# EAGLE board force_sensor_pcb_v2_4pcs (EAGLE 9.2.2)
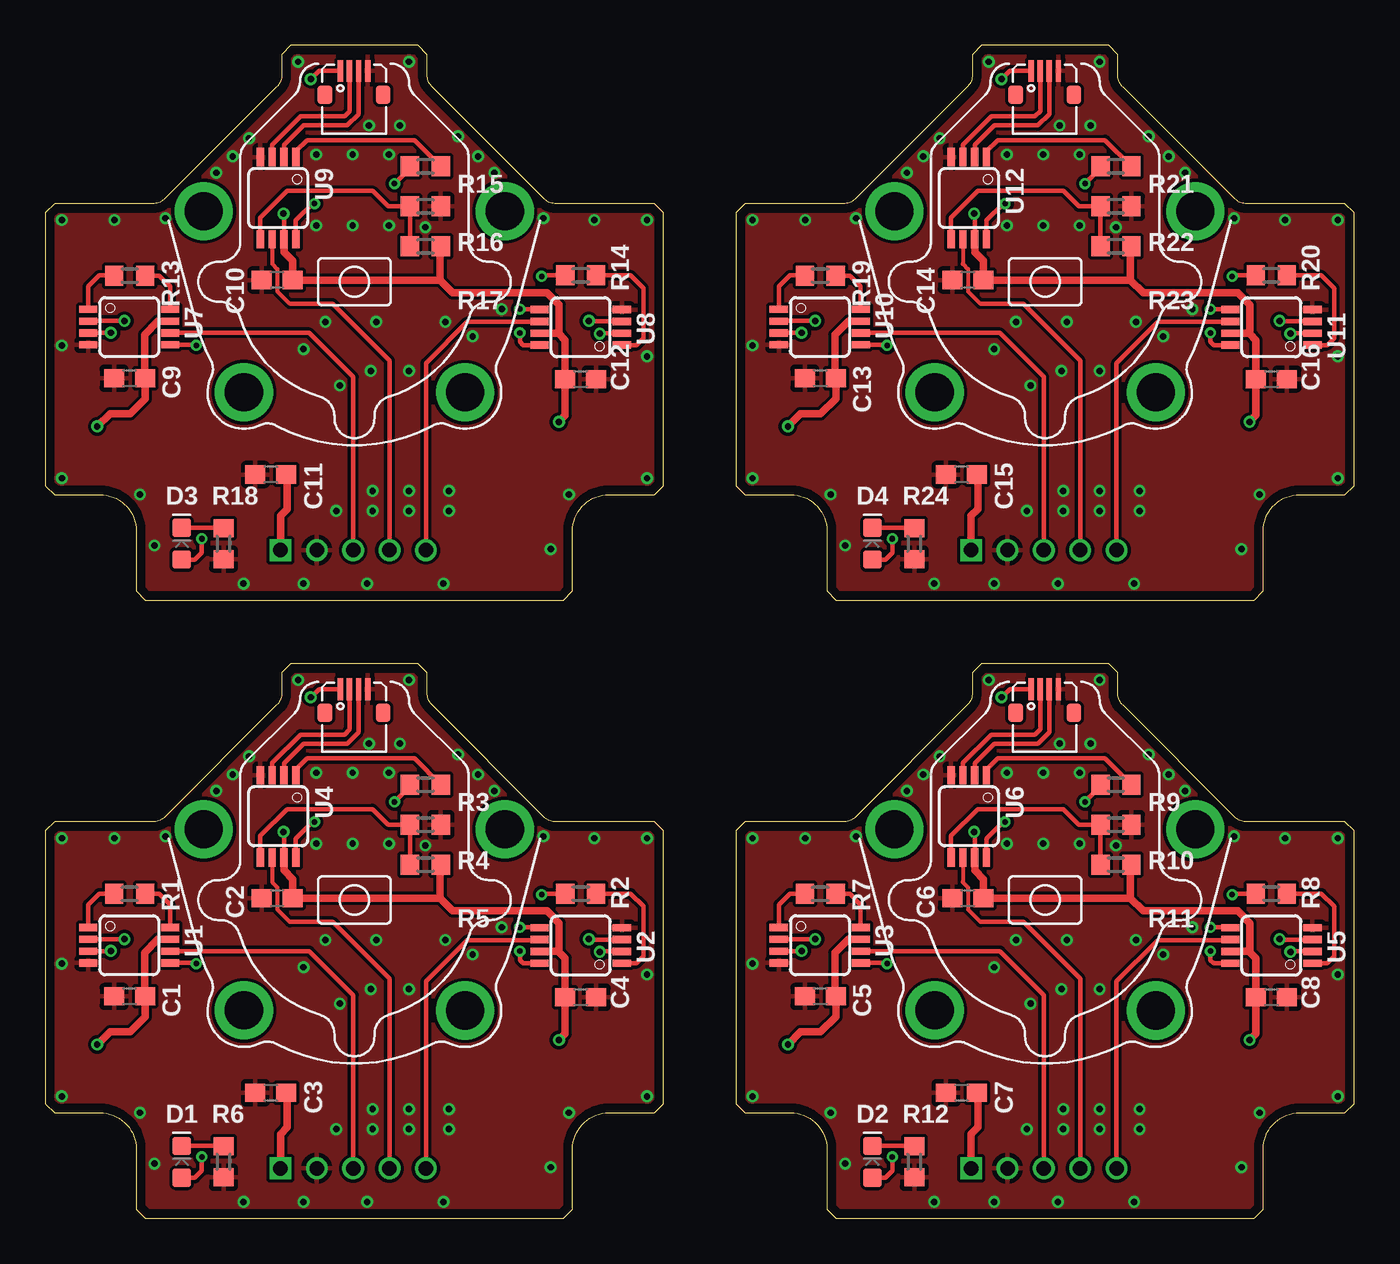
[diagram p0: board, top side]
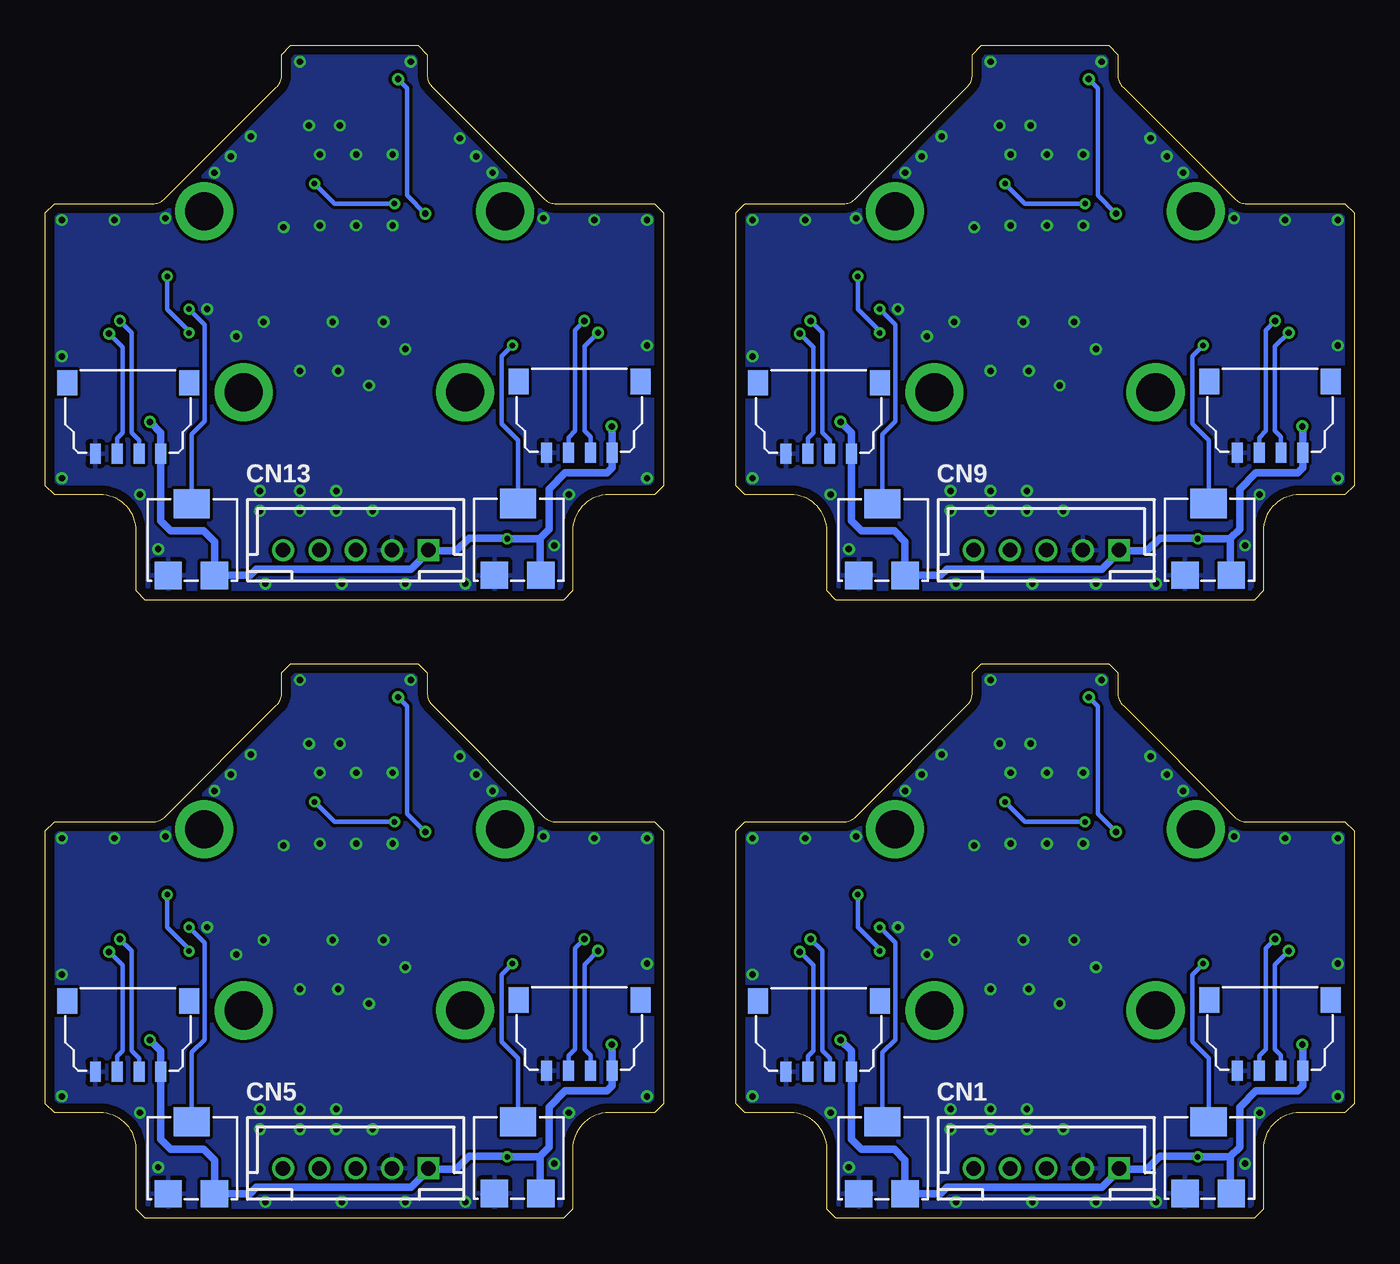
[diagram p1: board, bottom side, seen from below]

Size 72 x 64.5 mm. Coordinates in mm from the lower left corner, seen from the top.
Outline: 28.5,0 29,0.5 29,3.8 arc-90 31,5.8 33.5,5.8 34,6.3 34,21.3 33.5,21.8 28.11,21.8 arc-45 27.4,22.09 21.29,28.2 arc-45 21,28.91 21,30 20.5,30.5 13.5,30.5 13,30 13,28.91 arc-45 12.71,28.2 6.6,22.09 arc-45 5.89,21.8 0.5,21.8 0,21.3 0,6.3 0.5,5.8 3,5.8 arc-90 5,3.8 5,0.5 5.5,0 28.5,0
Outline: 66.5,0 67,0.5 67,3.8 arc-90 69,5.8 71.5,5.8 72,6.3 72,21.3 71.5,21.8 66.11,21.8 arc-45 65.4,22.09 59.29,28.2 arc-45 59,28.91 59,30 58.5,30.5 51.5,30.5 51,30 51,28.91 arc-45 50.71,28.2 44.6,22.09 arc-45 43.89,21.8 38.5,21.8 38,21.3 38,6.3 38.5,5.8 41,5.8 arc-90 43,3.8 43,0.5 43.5,0 66.5,0
Outline: 28.5,34 29,34.5 29,37.8 arc-90 31,39.8 33.5,39.8 34,40.3 34,55.3 33.5,55.8 28.11,55.8 arc-45 27.4,56.09 21.29,62.2 arc-45 21,62.91 21,64 20.5,64.5 13.5,64.5 13,64 13,62.91 arc-45 12.71,62.2 6.6,56.09 arc-45 5.89,55.8 0.5,55.8 0,55.3 0,40.3 0.5,39.8 3,39.8 arc-90 5,37.8 5,34.5 5.5,34 28.5,34
Outline: 66.5,34 67,34.5 67,37.8 arc-90 69,39.8 71.5,39.8 72,40.3 72,55.3 71.5,55.8 66.11,55.8 arc-45 65.4,56.09 59.29,62.2 arc-45 59,62.91 59,64 58.5,64.5 51.5,64.5 51,64 51,62.91 arc-45 50.71,62.2 44.6,56.09 arc-45 43.89,55.8 38.5,55.8 38,55.3 38,40.3 38.5,39.8 41,39.8 arc-90 43,37.8 43,34.5 43.5,34 66.5,34
Copper layers (1*16): Top 0.035mm / dielectric 1.6mm / Bottom 0.035mm
Design rules "Elecrow_2-layer_PCB_eagle_rule": minimum track width 6mil, minimum drill 12mil, track to track 7mil, track to pad 7mil, pad to pad 7mil, via to via 8mil, smd to smd 0mil, copper to edge 20mil, drill to drill 10mil, minimum pad ring 6mil, minimum via ring 6mil, stop-mask expansion 0mil, vias tented up to drill 100mil, thermal gap 10mil

## Footprints (pad centres in the part's own frame; a part is rotated, then mirrored left to right if it is on the bottom)
C0603 = smd 1.1 x 1: 1 -0.85,0; 2 0.85,0
B5B-PH-K-S = drill 0.8 square: 1 -4,0 | drill 0.8: 2 -2,0; 3 0,0; 4 2,0; 5 4,0
DF58-4P = smd 0.6 x 1.1: 1 -1.8,4.6; 2 -0.6,4.6; 3 0.6,4.6; 4 1.8,4.6 | smd 1.1 x 1.4: PAD1 -3.35,0.7; PAD2 3.35,0.7
KYOCERA-6277-4 = smd 0.3 x 1.2: 1 -0.75,1.3; 2 -0.25,1.3; 3 0.25,1.3; 4 0.75,1.3 | smd 0.8 x 1: PAD-1 -1.6,0; PAD-2 1.6,0
LED-0603 = smd 1 x 1: A -0.877,0; C 0.877,0
R0603 = smd 1 x 1.1: 1 -0.85,0; 2 0.85,0
MSOP08 = smd 0.4 x 1: 1 -0.976,-2.263; 2 -0.326,-2.263; 3 0.324,-2.263; 4 0.974,-2.263; 5 0.974,2.262; 6 0.324,2.262; 7 -0.326,2.262; 8 -0.976,2.262
D43A = smd 1.5 x 1.5: 1 1.25,-1.95; 3 -1.3,-1.95 | smd 2 x 1.6: 2 0,2

## Placement (x,y rotation side)
C1  [C0603]  4.63,12.2 180 top
C2  [C0603]  12.75,17.6 180 top
C3  [C0603]  12.4,6.9 180 top
C4  [C0603]  29.45,12.15 0 top
C5  [C0603]  42.63,12.2 180 top
C6  [C0603]  50.75,17.6 180 top
C7  [C0603]  50.4,6.9 180 top
C8  [C0603]  67.45,12.15 0 top
C9  [C0603]  4.63,46.2 180 top
C10  [C0603]  12.75,51.6 180 top
C11  [C0603]  12.4,40.9 180 top
C12  [C0603]  29.45,46.15 0 top
C13  [C0603]  42.63,46.2 180 top
C14  [C0603]  50.75,51.6 180 top
C15  [C0603]  50.4,40.9 180 top
C16  [C0603]  67.45,46.15 0 top
CN1  [B5B-PH-K-S]  16.93,2.74 180 bottom
CN2  DF58-4P4P  [DF58-4P]  4.62,12.71 180 bottom
CN3  DF58-4P4P  [DF58-4P]  29.45,12.65 180 bottom
CN4  KYOCERA-62774P  [KYOCERA-6277-4]  16.98,27.8 0 top
CN5  [B5B-PH-K-S]  54.93,2.74 180 bottom
CN6  DF58-4P4P  [DF58-4P]  42.62,12.71 180 bottom
CN7  KYOCERA-62774P  [KYOCERA-6277-4]  54.98,27.8 0 top
CN8  DF58-4P4P  [DF58-4P]  67.45,12.65 180 bottom
CN9  [B5B-PH-K-S]  16.93,36.74 180 bottom
CN10  DF58-4P4P  [DF58-4P]  4.62,46.71 180 bottom
CN11  KYOCERA-62774P  [KYOCERA-6277-4]  16.98,61.8 0 top
CN12  DF58-4P4P  [DF58-4P]  29.45,46.65 180 bottom
CN13  [B5B-PH-K-S]  54.93,36.74 180 bottom
CN14  DF58-4P4P  [DF58-4P]  42.62,46.71 180 bottom
CN15  KYOCERA-62774P  [KYOCERA-6277-4]  54.98,61.8 0 top
CN16  DF58-4P4P  [DF58-4P]  67.45,46.65 180 bottom
D1  BLUE  [LED-0603]  7.5,3.1 90 top
D2  BLUE  [LED-0603]  45.5,3.1 90 top
D3  BLUE  [LED-0603]  7.5,37.1 90 top
D4  BLUE  [LED-0603]  45.5,37.1 90 top
R1  [R0603]  4.63,17.84 180 top
R2  [R0603]  29.45,17.85 0 top
R3  1.3k  [R0603]  20.9,23.85 0 top
R4  3k  [R0603]  20.9,21.65 0 top
R5  10k  [R0603]  20.9,19.45 180 top
R6  [R0603]  9.8,3.1 270 top
R7  [R0603]  42.63,17.84 180 top
R8  [R0603]  67.45,17.85 0 top
R9  1.3k  [R0603]  58.9,23.85 0 top
R10  3k  [R0603]  58.9,21.65 0 top
R11  10k  [R0603]  58.9,19.45 180 top
R12  [R0603]  47.8,3.1 270 top
R13  [R0603]  4.63,51.84 180 top
R14  [R0603]  29.45,51.85 0 top
R15  1.3k  [R0603]  20.9,57.85 0 top
R16  3k  [R0603]  20.9,55.65 0 top
R17  10k  [R0603]  20.9,53.45 180 top
R18  [R0603]  9.8,37.1 270 top
R19  [R0603]  42.63,51.84 180 top
R20  [R0603]  67.45,51.85 0 top
R21  1.3k  [R0603]  58.9,57.85 0 top
R22  3k  [R0603]  58.9,55.65 0 top
R23  10k  [R0603]  58.9,53.45 180 top
R24  [R0603]  47.8,37.1 270 top
U1  AD623RM-8  [MSOP08]  4.61,15.01 270 top
U2  AD623RM-8  [MSOP08]  29.45,15 90 top
U3  AD623RM-8  [MSOP08]  42.61,15.01 270 top
U4  AD623RM-8  [MSOP08]  12.8,22.1 180 top
U5  AD623RM-8  [MSOP08]  67.45,15 90 top
U6  AD623RM-8  [MSOP08]  50.8,22.1 180 top
U7  AD623RM-8  [MSOP08]  4.61,49.01 270 top
U8  AD623RM-8  [MSOP08]  29.45,49 90 top
U9  AD623RM-8  [MSOP08]  12.8,56.1 180 top
U10  AD623RM-8  [MSOP08]  42.61,49.01 270 top
U11  AD623RM-8  [MSOP08]  67.45,49 90 top
U12  AD623RM-8  [MSOP08]  50.8,56.1 180 top
VR1  D43A  [D43A]  8,3.31 0 bottom
VR2  D43A  [D43A]  25.95,3.3 0 bottom
VR3  D43A  [D43A]  46,3.31 0 bottom
VR4  D43A  [D43A]  63.95,3.3 0 bottom
VR5  D43A  [D43A]  8,37.31 0 bottom
VR6  D43A  [D43A]  25.95,37.3 0 bottom
VR7  D43A  [D43A]  46,37.31 0 bottom
VR8  D43A  [D43A]  63.95,37.3 0 bottom

## Library data of the parts
C1-C16 = rcl; SPICEPREFIX: C
CN1 CN5 CN9 CN13 = jst-ph
CN2-CN4 CN6-CN8 CN10-CN12 CN14-CN16 U1-U12 VR1-VR8 = yunit-tech_eagle_library
D1-D4 = yunit-tech_eagle_library; PROD_ID: DIO-08575
R1-R24 = rcl; SPICEPREFIX: R

## Nets
+3V1: C5.1 C6.1 C7.1 C8.1 CN5.1 CN6.1 CN7.1 CN8.1 D2.A R11.1 U3.7 U5.7 U6.7 VR3.1 VR4.1
+3V2: C9.1 C10.1 C11.1 C12.1 CN9.1 CN10.1 CN11.1 CN12.1 D3.A R17.1 U7.7 U8.7 U9.7 VR5.1 VR6.1
+3V3: C1.1 C2.1 C3.1 C4.1 CN1.1 CN2.1 CN3.1 CN4.1 D1.A R5.1 U1.7 U2.7 U4.7 VR1.1 VR2.1
+3V4: C13.1 C14.1 C15.1 C16.1 CN13.1 CN14.1 CN15.1 CN16.1 D4.A R23.1 U10.7 U11.7 U12.7 VR7.1 VR8.1
A1: CN1.3 U1.6
A2: CN1.4 U4.6
A3: CN1.5 U2.6
A4: CN5.3 U3.6
A5: CN5.4 U6.6
A6: CN5.5 U5.6
A7: CN9.3 U7.6
A8: CN9.4 U9.6
A9: CN9.5 U8.6
A10: CN13.3 U10.6
A11: CN13.4 U12.6
A12: CN13.5 U11.6
GND: C1.2 C2.2 C3.2 C4.2 CN1.2 CN2.4 CN3.4 CN4.4 R4.2 R6.2 U1.4 U2.4 U4.4 VR1.3 VR2.3
GND1: C5.2 C6.2 C7.2 C8.2 CN5.2 CN6.4 CN7.4 CN8.4 R10.2 R12.2 U3.4 U5.4 U6.4 VR3.3 VR4.3
GND2: C9.2 C10.2 C11.2 C12.2 CN9.2 CN10.4 CN11.4 CN12.4 R16.2 R18.2 U7.4 U8.4 U9.4 VR5.3 VR6.3
GND3: C13.2 C14.2 C15.2 C16.2 CN13.2 CN14.4 CN15.4 CN16.4 R22.2 R24.2 U10.4 U11.4 U12.4 VR7.3 VR8.3
N$3: U1.5 VR1.2
N$5: CN2.3 U1.2
N$6: R1.1 U1.8
N$7: R1.2 U1.1
N$8: CN2.2 U1.3
N$10: R2.1 U2.8
N$11: U2.5 VR2.2
N$12: CN3.3 U2.2
N$13: CN3.2 U2.3
N$14: R2.2 U2.1
N$15: R3.1 U4.8
N$16: R4.1 R5.2 U4.5
N$17: CN4.3 U4.2
N$18: CN4.2 U4.3
N$19: R3.2 U4.1
N$20: D1.C R6.1
N$21: R7.1 U3.8
N$22: U3.5 VR3.2
N$23: CN6.3 U3.2
N$24: CN6.2 U3.3
N$29: R7.2 U3.1
N$30: R8.1 U5.8
N$31: U5.5 VR4.2
N$32: CN8.3 U5.2
N$33: CN8.2 U5.3
N$34: R8.2 U5.1
N$35: R9.1 U6.8
N$36: R10.1 R11.2 U6.5
N$37: CN7.3 U6.2
N$38: CN7.2 U6.3
N$39: R9.2 U6.1
N$40: D2.C R12.1
N$41: R13.1 U7.8
N$42: U7.5 VR5.2
N$43: CN10.3 U7.2
N$44: CN10.2 U7.3
N$49: R13.2 U7.1
N$50: R14.1 U8.8
N$51: U8.5 VR6.2
N$52: CN12.3 U8.2
N$53: CN12.2 U8.3
N$54: R14.2 U8.1
N$55: R15.1 U9.8
N$56: R16.1 R17.2 U9.5
N$57: CN11.3 U9.2
N$58: CN11.2 U9.3
N$59: R15.2 U9.1
N$60: D3.C R18.1
N$61: R19.1 U10.8
N$62: U10.5 VR7.2
N$63: CN14.3 U10.2
N$64: CN14.2 U10.3
N$69: R19.2 U10.1
N$70: R20.1 U11.8
N$71: U11.5 VR8.2
N$72: CN16.3 U11.2
N$73: CN16.2 U11.3
N$74: R20.2 U11.1
N$75: R21.1 U12.8
N$76: R22.1 R23.2 U12.5
N$77: CN15.3 U12.2
N$78: CN15.2 U12.3
N$79: R21.2 U12.1
N$80: D4.C R24.1

## Tracks (layer width: path | path; a pad name or v marks a point on that pad's centre or on a via)
+3V1  (via drill 0.3, 0.35)
  Top 0.25: CN7.1 53.05,29.1 v52.6,28.65 | U6.7 51.13,21.22 v51.1,21.25 | D2.A 46.22,2.22 46.6,2.6 v46.6,3.37
  Top 0.4: U5.7 66.11,14.67 66.17,14.73 66.27,14.63 | 66.27,14.63 66.6,14.3 C8.1 66.6,10.15 v66.25,9.8 | U6.7 51.13,19.12 51.6,18.65 C6.1 59.7,17.6 | U3.7 44.19,15.34 43.45,14.6 43.45,12.23 C5.1 43.48,11.08 42.65,10.25 41.55,10.25 v40.85,9.55 | CN5.1 50.93,4.63 51.3,5 51.3,6.85 C7.1 | 66.27,14.63 66.27,16.23 65.6,16.9 60.4,16.9 59.7,17.6 | 59.7,17.6 59.7,19.4 R11.1
  Bottom 0.25: v51.1,21.25 52.1,22.25 52.1,28.15 v52.6,28.65
  Bottom 0.4: v40.85,9.55 40.82,9.52 CN6.1 40.82,7.28 41.1,7 43.4,7 44.3,6.1 44.3,3.9 44.8,3.4 | v66.25,9.8 65.65,9.2 CN8.1 65.65,4.35 65.1,3.8 63.3,3.8 62.7,3.2 VR4.1 60.75,1.35 60.4,1.7 51.89,1.7 50.89,2.7 | VR3.1 44.8,1.41 44.8,3.4 | 50.89,2.7 49.4,2.7 48.7,3.4 46.63,3.4 v46.6,3.37 44.83,3.37 44.8,3.4 | 50.89,2.7 CN5.1
+3V2  (via drill 0.3, 0.35)
  Top 0.25: CN11.1 15.05,63.1 v14.6,62.65 | U9.7 13.13,55.22 v13.1,55.25 | D3.A 8.22,36.22 8.6,36.6 v8.6,37.37
  Top 0.4: U8.7 28.11,48.67 28.17,48.73 28.27,48.63 | 28.27,48.63 28.6,48.3 C12.1 28.6,44.15 v28.25,43.8 | U9.7 13.13,53.12 13.6,52.65 C10.1 21.7,51.6 | U7.7 6.19,49.34 5.45,48.6 5.45,46.23 C9.1 5.48,45.08 4.65,44.25 3.55,44.25 v2.85,43.55 | CN9.1 12.93,38.63 13.3,39 13.3,40.85 C11.1 | 28.27,48.63 28.27,50.23 27.6,50.9 22.4,50.9 21.7,51.6 | 21.7,51.6 21.7,53.4 R17.1
  Bottom 0.25: v13.1,55.25 14.1,56.25 14.1,62.15 v14.6,62.65
  Bottom 0.4: v2.85,43.55 2.82,43.52 CN10.1 2.82,41.28 3.1,41 5.4,41 6.3,40.1 6.3,37.9 6.8,37.4 | v28.25,43.8 27.65,43.2 CN12.1 27.65,38.35 27.1,37.8 25.3,37.8 24.7,37.2 VR6.1 22.75,35.35 22.4,35.7 13.89,35.7 12.89,36.7 | VR5.1 6.8,35.41 6.8,37.4 | 12.89,36.7 11.4,36.7 10.7,37.4 8.63,37.4 v8.6,37.37 6.83,37.37 6.8,37.4 | 12.89,36.7 CN9.1
+3V3  (via drill 0.3, 0.35)
  Top 0.25: CN4.1 15.05,29.1 v14.6,28.65 | U4.7 13.13,21.22 v13.1,21.25 | D1.A 8.22,2.22 8.6,2.6 v8.6,3.37
  Top 0.4: U2.7 28.11,14.67 28.17,14.73 28.27,14.63 | 28.27,14.63 28.6,14.3 C4.1 28.6,10.15 v28.25,9.8 | U4.7 13.13,19.12 13.6,18.65 C2.1 21.7,17.6 | U1.7 6.19,15.34 5.45,14.6 5.45,12.23 C1.1 5.48,11.08 4.65,10.25 3.55,10.25 v2.85,9.55 | CN1.1 12.93,4.63 13.3,5 13.3,6.85 C3.1 | 28.27,14.63 28.27,16.23 27.6,16.9 22.4,16.9 21.7,17.6 | 21.7,17.6 21.7,19.4 R5.1
  Bottom 0.25: v13.1,21.25 14.1,22.25 14.1,28.15 v14.6,28.65
  Bottom 0.4: v2.85,9.55 2.82,9.52 CN2.1 2.82,7.28 3.1,7 5.4,7 6.3,6.1 6.3,3.9 6.8,3.4 | v28.25,9.8 27.65,9.2 CN3.1 27.65,4.35 27.1,3.8 25.3,3.8 24.7,3.2 VR2.1 22.75,1.35 22.4,1.7 13.89,1.7 12.89,2.7 | VR1.1 6.8,1.41 6.8,3.4 | 12.89,2.7 11.4,2.7 10.7,3.4 8.63,3.4 v8.6,3.37 6.83,3.37 6.8,3.4 | 12.89,2.7 CN1.1
+3V4  (via drill 0.3, 0.35)
  Top 0.25: CN15.1 53.05,63.1 v52.6,62.65 | U12.7 51.13,55.22 v51.1,55.25 | D4.A 46.22,36.22 46.6,36.6 v46.6,37.37
  Top 0.4: U11.7 66.11,48.67 66.17,48.73 66.27,48.63 | 66.27,48.63 66.6,48.3 C16.1 66.6,44.15 v66.25,43.8 | U12.7 51.13,53.12 51.6,52.65 C14.1 59.7,51.6 | U10.7 44.19,49.34 43.45,48.6 43.45,46.23 C13.1 43.48,45.08 42.65,44.25 41.55,44.25 v40.85,43.55 | CN13.1 50.93,38.63 51.3,39 51.3,40.85 C15.1 | 66.27,48.63 66.27,50.23 65.6,50.9 60.4,50.9 59.7,51.6 | 59.7,51.6 59.7,53.4 R23.1
  Bottom 0.25: v51.1,55.25 52.1,56.25 52.1,62.15 v52.6,62.65
  Bottom 0.4: v40.85,43.55 40.82,43.52 CN14.1 40.82,41.28 41.1,41 43.4,41 44.3,40.1 44.3,37.9 44.8,37.4 | v66.25,43.8 65.65,43.2 CN16.1 65.65,38.35 65.1,37.8 63.3,37.8 62.7,37.2 VR8.1 60.75,35.35 60.4,35.7 51.89,35.7 50.89,36.7 | VR7.1 44.8,35.41 44.8,37.4 | 50.89,36.7 49.4,36.7 48.7,37.4 46.63,37.4 v46.6,37.37 44.83,37.37 44.8,37.4 | 50.89,36.7 CN13.1
A1
  Top 0.25: U1.6 14.51,14.69 16.93,12.27 CN1.3
A2
  Top 0.22: U4.6 12.48,18.48 12.76,18.2 12.76,16.98 13.44,16.3 13.46,16.3
  Top 0.25: 13.46,16.3 15.8,16.3 18.93,13.17 CN1.4
A3
  Top 0.25: U2.6 27.16,15.3 23.2,15.3 20.93,13.03 CN1.5
A4
  Top 0.25: U3.6 52.51,14.69 54.93,12.27 CN5.3
A5
  Top 0.22: U6.6 50.48,18.48 50.76,18.2 50.76,16.98 51.44,16.3 51.46,16.3
  Top 0.25: 51.46,16.3 53.8,16.3 56.93,13.17 CN5.4
A6
  Top 0.25: U5.6 65.16,15.3 61.2,15.3 58.93,13.03 CN5.5
A7
  Top 0.25: U7.6 14.51,48.69 16.93,46.27 CN9.3
A8
  Top 0.22: U9.6 12.48,52.48 12.76,52.2 12.76,50.98 13.44,50.3 13.46,50.3
  Top 0.25: 13.46,50.3 15.8,50.3 18.93,47.17 CN9.4
A9
  Top 0.25: U8.6 27.16,49.3 23.2,49.3 20.93,47.03 CN9.5
A10
  Top 0.25: U10.6 52.51,48.69 54.93,46.27 CN13.3
A11
  Top 0.22: U12.6 50.48,52.48 50.76,52.2 50.76,50.98 51.44,50.3 51.46,50.3
  Top 0.25: 51.46,50.3 53.8,50.3 56.93,47.17 CN13.4
A12
  Top 0.25: U11.6 65.16,49.3 61.2,49.3 58.93,47.03 CN13.5
GND  (via drill 0.35)
  other vias: 27.8,2.8 13.9,29.6 20,29.6 17.8,26.1 19.5,26.1 24.7,23.5 23.8,24.4 22.7,25.5 9.4,23.5 10.3,24.4 11.2,25.4 20.9,20.5 16.9,20.6 18.9,24.5 16.9,24.5 6.6,21 0.9,20.9 3.8,20.9 0.9,6.7 0.9,14 33.1,6.7 33.1,20.9 33.1,13.4 27.4,21 30.2,20.9 6,3 28.8,5.8 5.2,5.8 18,4.9 18,6 20,4.9 20,6 22.2,4.9 16,4.9 14.2,13.8 16.2,11.8 15.4,15.3 17.9,12.6 20,12.6 18.2,15.3 23.5,14.5 25.1,16 22,15.3 22.2,6 10.9,0.9 21.9,0.9 17.7,0.9 14.2,0.9 18.9,20.6 14.9,24.5 14.9,20.6
  pour Top: 0,0 34,0 34,30.5 0,30.5
  pour Bottom: 0,0 34,0 34,31.4 0,31.4
GND1  (via drill 0.35)
  other vias: 65.8,2.8 51.9,29.6 58,29.6 55.8,26.1 57.5,26.1 62.7,23.5 61.8,24.4 60.7,25.5 47.4,23.5 48.3,24.4 49.2,25.4 58.9,20.5 54.9,20.6 56.9,24.5 54.9,24.5 44.6,21 38.9,20.9 41.8,20.9 38.9,6.7 38.9,14 71.1,6.7 71.1,20.9 71.1,13.4 65.4,21 68.2,20.9 44,3 66.8,5.8 43.2,5.8 56,4.9 56,6 58,4.9 58,6 60.2,4.9 54,4.9 52.2,13.8 54.2,11.8 53.4,15.3 55.9,12.6 58,12.6 56.2,15.3 61.5,14.5 63.1,16 60,15.3 60.2,6 48.9,0.9 59.9,0.9 55.7,0.9 52.2,0.9 56.9,20.6 52.9,24.5 52.9,20.6
  pour Top: 38,0 72,0 72,30.5 38,30.5
  pour Bottom: 38,0 72,0 72,31.4 38,31.4
GND2  (via drill 0.35)
  other vias: 27.8,36.8 13.9,63.6 20,63.6 17.8,60.1 19.5,60.1 24.7,57.5 23.8,58.4 22.7,59.5 9.4,57.5 10.3,58.4 11.2,59.4 20.9,54.5 16.9,54.6 18.9,58.5 16.9,58.5 6.6,55 0.9,54.9 3.8,54.9 0.9,40.7 0.9,48 33.1,40.7 33.1,54.9 33.1,47.4 27.4,55 30.2,54.9 6,37 28.8,39.8 5.2,39.8 18,38.9 18,40 20,38.9 20,40 22.2,38.9 16,38.9 14.2,47.8 16.2,45.8 15.4,49.3 17.9,46.6 20,46.6 18.2,49.3 23.5,48.5 25.1,50 22,49.3 22.2,40 10.9,34.9 21.9,34.9 17.7,34.9 14.2,34.9 18.9,54.6 14.9,58.5 14.9,54.6
  pour Top: 0,34 34,34 34,64.5 0,64.5
  pour Bottom: 0,34 34,34 34,65.4 0,65.4
GND3  (via drill 0.35)
  other vias: 65.8,36.8 51.9,63.6 58,63.6 55.8,60.1 57.5,60.1 62.7,57.5 61.8,58.4 60.7,59.5 47.4,57.5 48.3,58.4 49.2,59.4 58.9,54.5 54.9,54.6 56.9,58.5 54.9,58.5 44.6,55 38.9,54.9 41.8,54.9 38.9,40.7 38.9,48 71.1,40.7 71.1,54.9 71.1,47.4 65.4,55 68.2,54.9 44,37 66.8,39.8 43.2,39.8 56,38.9 56,40 58,38.9 58,40 60.2,38.9 54,38.9 52.2,47.8 54.2,45.8 53.4,49.3 55.9,46.6 58,46.6 56.2,49.3 61.5,48.5 63.1,50 60,49.3 60.2,40 48.9,34.9 59.9,34.9 55.7,34.9 52.2,34.9 56.9,54.6 52.9,58.5 52.9,54.6
  pour Top: 38,34 72,34 72,64.5 38,64.5
  pour Bottom: 38,34 72,34 72,65.4 38,65.4
N$1  (via drill 2.1 pad 3.2)
  other vias: 23.09,11.42
N$2  (via drill 2.1 pad 3.2)
  other vias: 10.92,11.43
N$3  (via drill 0.3)
  Top 0.25: v8.3,14 8.26,14.04 U1.5
  Bottom 0.25: VR1.2 8,8.8 8.9,9.7 8.9,13.4 v8.3,14
N$4  (via drill 2.1 pad 3.2)
  other vias: 8.71,21.39
N$5  (via drill 0.35)
  Top 0.25: v4.35,15.35 2.36,15.35 U1.2
  Bottom 0.25: CN2.3 5.22,8.93 4.85,9.3 4.85,14.85 v4.35,15.35
N$6
  Top 0.25: R1.1 6.26,17.84 6.85,17.25 6.85,16.01 U1.8
N$7
  Top 0.25: U1.1 2.35,17.25 2.95,17.85 R1.2
N$8  (via drill 0.35)
  Top 0.25: v3.6,14.7 3.59,14.69 U1.3
  Bottom 0.25: CN2.2 4.02,8.97 4.35,9.3 4.35,13.95 v3.6,14.7
N$9  (via drill 2.1 pad 3.2)
  other vias: 25.27,21.39
N$10  (via drill 0.3)
  Top 0.25: R2.1 27.35,17.85 v27.3,17.8 | U2.8 26.28,14.02 26.1,14.2 v26.1,14.69
  Bottom 0.25: v27.3,17.8 27.3,15.99 26.1,14.79 v26.1,14.69
N$11  (via drill 0.3)
  Top 0.25: U2.5 27.16,16 v26.1,16
  Bottom 0.25: VR2.2 25.95,9.12 25.25,9.82 25.25,15.15 v26.1,16
N$12  (via drill 0.35)
  Top 0.25: v30.5,14.65 30.52,14.67 U2.2
  Bottom 0.25: CN3.3 30.05,8.9 29.75,9.2 29.75,13.9 v30.5,14.65
N$13  (via drill 0.35)
  Top 0.25: v29.9,15.35 29.93,15.32 U2.3
  Bottom 0.25: CN3.2 28.85,8.8 29.25,9.2 29.25,14.7 v29.9,15.35
N$14
  Top 0.25: U2.1 32.52,14.02 32.9,14.4 32.9,17.15 32.2,17.85 R2.2
N$15  (via drill 0.3)
  Top 0.25: U4.8 13.78,20.88 14.7,21.8 v14.8,21.8 | v19.2,22.9 20.05,23.75 R3.1
  Bottom 0.25: v14.8,21.8 18.1,21.8 v19.2,22.9
N$16
  Top 0.25: U4.5 11.83,21.03 13.3,22.5 18,22.5 18.85,21.65 R4.1 R5.2
N$17
  Top 0.25: CN4.3 17.23,26.73 16.6,26.1 14.2,26.1 13.13,25.03 U4.2
N$18
  Top 0.25: U4.3 12.48,25.05 14.03,26.6 16.45,26.6 16.73,26.88 CN4.2
N$19
  Top 0.25: U4.1 13.78,24.68 14.4,25.3 20.3,25.3 R3.2
N$20
  Top 0.25: D1.C 9.77,3.98 R6.1
N$21
  Top 0.25: R7.1 44.26,17.84 44.85,17.25 44.85,16.01 U3.8
N$22  (via drill 0.3)
  Top 0.25: v46.3,14 46.26,14.04 U3.5
  Bottom 0.25: VR3.2 46,8.8 46.9,9.7 46.9,13.4 v46.3,14
N$23  (via drill 0.35)
  Top 0.25: v42.35,15.35 U3.2
  Bottom 0.25: CN6.3 43.22,8.93 42.85,9.3 42.85,14.85 v42.35,15.35
N$24  (via drill 0.35)
  Top 0.25: v41.6,14.7 41.59,14.69 U3.3
  Bottom 0.25: CN6.2 42.02,8.97 42.35,9.3 42.35,13.95 v41.6,14.7
N$25  (via drill 2.1 pad 3.2)
  other vias: 61.09,11.42
N$26  (via drill 2.1 pad 3.2)
  other vias: 48.92,11.43
N$27  (via drill 2.1 pad 3.2)
  other vias: 46.71,21.39
N$28  (via drill 2.1 pad 3.2)
  other vias: 63.27,21.39
N$29
  Top 0.25: U3.1 40.35,17.25 40.95,17.85 R7.2
N$30  (via drill 0.3)
  Top 0.25: R8.1 65.35,17.85 v65.3,17.8 | U5.8 64.28,14.02 64.1,14.2 v64.1,14.69
  Bottom 0.25: v65.3,17.8 65.3,15.99 64.1,14.79 v64.1,14.69
N$31  (via drill 0.3)
  Top 0.25: U5.5 65.16,16 v64.1,16
  Bottom 0.25: VR4.2 63.95,9.12 63.25,9.82 63.25,15.15 v64.1,16
N$32  (via drill 0.35)
  Top 0.25: v68.5,14.65 68.52,14.67 U5.2
  Bottom 0.25: CN8.3 68.05,8.9 67.75,9.2 67.75,13.9 v68.5,14.65
N$33  (via drill 0.35)
  Top 0.25: v67.9,15.35 67.93,15.32 U5.3
  Bottom 0.25: CN8.2 66.85,8.8 67.25,9.2 67.25,14.7 v67.9,15.35
N$34
  Top 0.25: U5.1 70.52,14.02 70.9,14.4 70.9,17.15 70.2,17.85 R8.2
N$35  (via drill 0.3)
  Top 0.25: U6.8 51.78,20.88 52.7,21.8 v52.8,21.8 | v57.2,22.9 58.05,23.75 R9.1
  Bottom 0.25: v52.8,21.8 56.1,21.8 v57.2,22.9
N$36
  Top 0.25: U6.5 49.83,21.03 51.3,22.5 56,22.5 56.85,21.65 R10.1 R11.2
N$37
  Top 0.25: CN7.3 55.23,26.73 54.6,26.1 52.2,26.1 51.13,25.03 U6.2
N$38
  Top 0.25: U6.3 50.48,25.05 52.03,26.6 54.45,26.6 54.73,26.88 CN7.2
N$39
  Top 0.25: U6.1 51.78,24.68 52.4,25.3 58.3,25.3 R9.2
N$40
  Top 0.25: D2.C 47.77,3.98 R12.1
N$41
  Top 0.25: R13.1 6.26,51.84 6.85,51.25 6.85,50.01 U7.8
N$42  (via drill 0.3)
  Top 0.25: v8.3,48 8.26,48.04 U7.5
  Bottom 0.25: VR5.2 8,42.8 8.9,43.7 8.9,47.4 v8.3,48
N$43  (via drill 0.35)
  Top 0.25: v4.35,49.35 2.36,49.35 U7.2
  Bottom 0.25: CN10.3 5.22,42.93 4.85,43.3 4.85,48.85 v4.35,49.35
N$44  (via drill 0.35)
  Top 0.25: v3.6,48.7 3.59,48.69 U7.3
  Bottom 0.25: CN10.2 4.02,42.97 4.35,43.3 4.35,47.95 v3.6,48.7
N$45  (via drill 2.1 pad 3.2)
  other vias: 23.09,45.42
N$46  (via drill 2.1 pad 3.2)
  other vias: 10.92,45.43
N$47  (via drill 2.1 pad 3.2)
  other vias: 8.71,55.39
N$48  (via drill 2.1 pad 3.2)
  other vias: 25.27,55.39
N$49
  Top 0.25: U7.1 2.35,51.25 2.95,51.85 R13.2
N$50  (via drill 0.3)
  Top 0.25: R14.1 27.35,51.85 v27.3,51.8 | U8.8 26.28,48.02 26.1,48.2 v26.1,48.69
  Bottom 0.25: v27.3,51.8 27.3,49.99 26.1,48.79 v26.1,48.69
N$51  (via drill 0.3)
  Top 0.25: U8.5 27.16,50 v26.1,50
  Bottom 0.25: VR6.2 25.95,43.12 25.25,43.83 25.25,49.15 v26.1,50
N$52  (via drill 0.35)
  Top 0.25: v30.5,48.65 30.52,48.67 U8.2
  Bottom 0.25: CN12.3 30.05,42.9 29.75,43.2 29.75,47.9 v30.5,48.65
N$53  (via drill 0.35)
  Top 0.25: v29.9,49.35 29.93,49.32 U8.3
  Bottom 0.25: CN12.2 28.85,42.8 29.25,43.2 29.25,48.7 v29.9,49.35
N$54
  Top 0.25: U8.1 32.52,48.02 32.9,48.4 32.9,51.15 32.2,51.85 R14.2
N$55  (via drill 0.3)
  Top 0.25: U9.8 13.78,54.88 14.7,55.8 v14.8,55.8 | v19.2,56.9 20.05,57.75 R15.1
  Bottom 0.25: v14.8,55.8 18.1,55.8 v19.2,56.9
N$56
  Top 0.25: U9.5 11.83,55.03 13.3,56.5 18,56.5 18.85,55.65 R16.1 R17.2
N$57
  Top 0.25: CN11.3 17.23,60.73 16.6,60.1 14.2,60.1 13.13,59.03 U9.2
N$58
  Top 0.25: U9.3 12.48,59.05 14.03,60.6 16.45,60.6 16.73,60.88 CN11.2
N$59
  Top 0.25: U9.1 13.78,58.68 14.4,59.3 20.3,59.3 R15.2
N$60
  Top 0.25: D3.C 9.77,37.98 R18.1
N$61
  Top 0.25: R19.1 44.26,51.84 44.85,51.25 44.85,50.01 U10.8
N$62  (via drill 0.3)
  Top 0.25: v46.3,48 46.26,48.04 U10.5
  Bottom 0.25: VR7.2 46,42.8 46.9,43.7 46.9,47.4 v46.3,48
N$63  (via drill 0.35)
  Top 0.25: v42.35,49.35 U10.2
  Bottom 0.25: CN14.3 43.22,42.93 42.85,43.3 42.85,48.85 v42.35,49.35
N$64  (via drill 0.35)
  Top 0.25: v41.6,48.7 41.59,48.69 U10.3
  Bottom 0.25: CN14.2 42.02,42.97 42.35,43.3 42.35,47.95 v41.6,48.7
N$65  (via drill 2.1 pad 3.2)
  other vias: 61.09,45.42
N$66  (via drill 2.1 pad 3.2)
  other vias: 48.92,45.43
N$67  (via drill 2.1 pad 3.2)
  other vias: 46.71,55.39
N$68  (via drill 2.1 pad 3.2)
  other vias: 63.27,55.39
N$69
  Top 0.25: U10.1 40.35,51.25 40.95,51.85 R19.2
N$70  (via drill 0.3)
  Top 0.25: R20.1 65.35,51.85 v65.3,51.8 | U11.8 64.28,48.02 64.1,48.2 v64.1,48.69
  Bottom 0.25: v65.3,51.8 65.3,49.99 64.1,48.79 v64.1,48.69
N$71  (via drill 0.3)
  Top 0.25: U11.5 65.16,50 v64.1,50
  Bottom 0.25: VR8.2 63.95,43.12 63.25,43.83 63.25,49.15 v64.1,50
N$72  (via drill 0.35)
  Top 0.25: v68.5,48.65 68.52,48.67 U11.2
  Bottom 0.25: CN16.3 68.05,42.9 67.75,43.2 67.75,47.9 v68.5,48.65
N$73  (via drill 0.35)
  Top 0.25: v67.9,49.35 67.93,49.32 U11.3
  Bottom 0.25: CN16.2 66.85,42.8 67.25,43.2 67.25,48.7 v67.9,49.35
N$74
  Top 0.25: U11.1 70.52,48.02 70.9,48.4 70.9,51.15 70.2,51.85 R20.2
N$75  (via drill 0.3)
  Top 0.25: U12.8 51.78,54.88 52.7,55.8 v52.8,55.8 | v57.2,56.9 58.05,57.75 R21.1
  Bottom 0.25: v52.8,55.8 56.1,55.8 v57.2,56.9
N$76
  Top 0.25: U12.5 49.83,55.03 51.3,56.5 56,56.5 56.85,55.65 R22.1 R23.2
N$77
  Top 0.25: CN15.3 55.23,60.73 54.6,60.1 52.2,60.1 51.13,59.03 U12.2
N$78
  Top 0.25: U12.3 50.48,59.05 52.03,60.6 54.45,60.6 54.73,60.88 CN15.2
N$79
  Top 0.25: U12.1 51.78,58.68 52.4,59.3 58.3,59.3 R21.2
N$80
  Top 0.25: D4.C 47.77,37.98 R24.1